# EAGLE board display_texto (EAGLE 5.02)
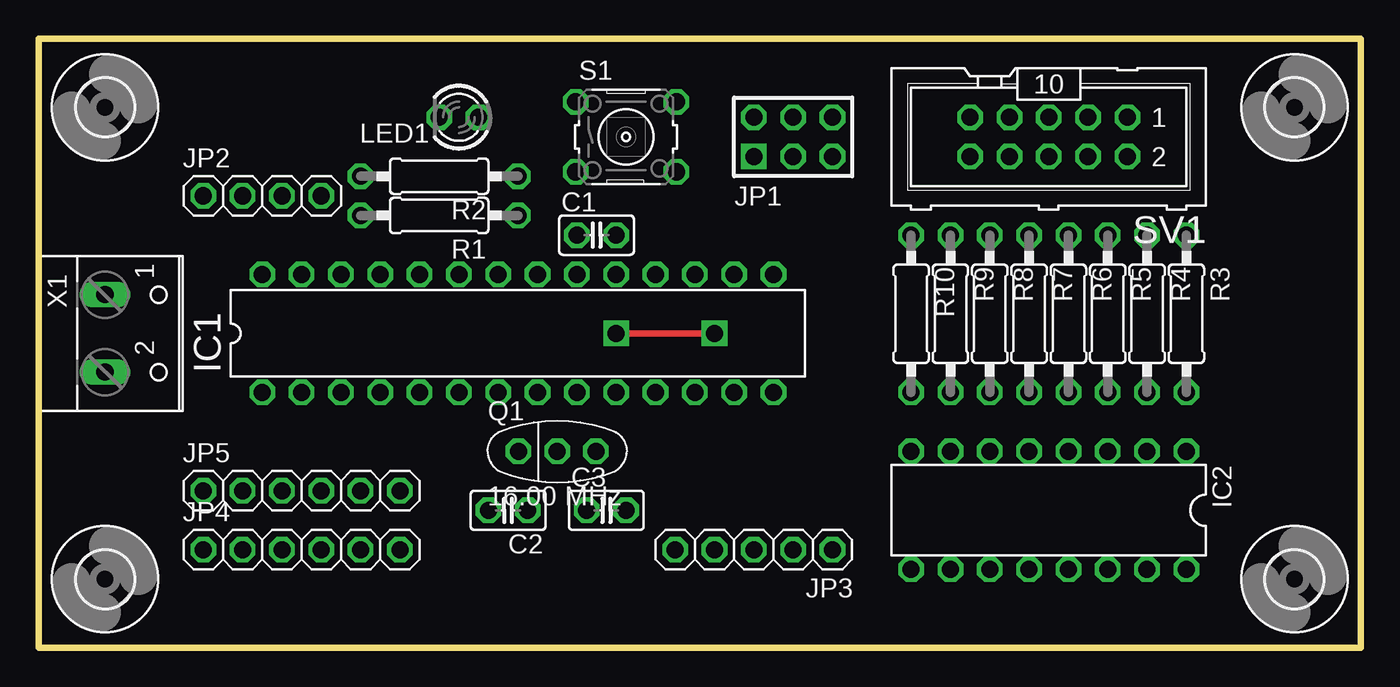
[diagram p0: board, top side]
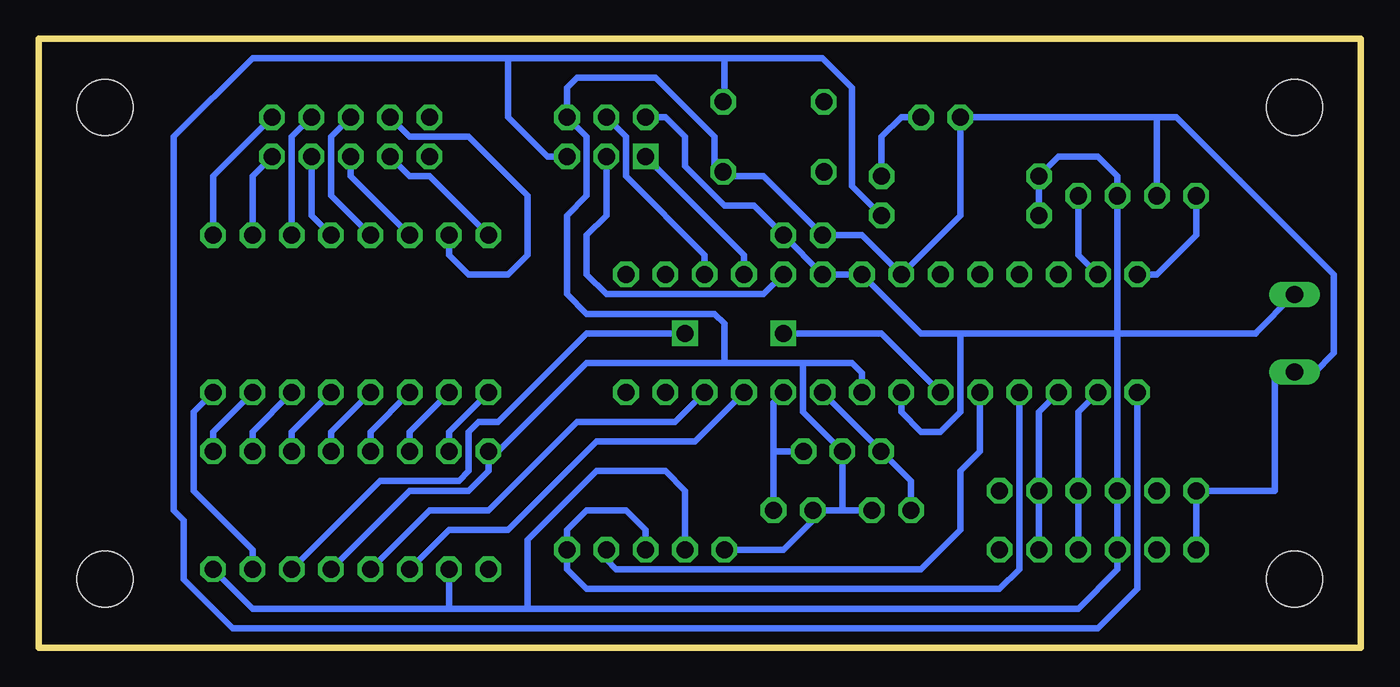
[diagram p1: board, bottom side, seen from below]

Size 85.4 x 39.36 mm. Coordinates in mm from the lower left corner, seen from the top.
Outline: 0,0 85.4,0 85.4,39.36 0,39.36 0,0
Copper layers (1*16): Top 0.035mm / dielectric 1.5mm / Bottom 0.035mm
Design rules "default": minimum track width 10mil, minimum drill 24mil, track to track 8mil, track to pad 8mil, pad to pad 8mil, via to via 8mil, smd to smd 8mil, copper to edge 40mil, drill to drill 8mil, minimum pad ring 10mil, minimum via ring 8mil, stop-mask expansion 4mil, vias tented up to drill 0mil, thermal gap 10mil

## Footprints (pad centres in the part's own frame; a part is rotated, then mirrored left to right if it is on the bottom)
C025-025X050 = drill 1.1 octagon: 1 -1.27,0; 2 1.27,0
DIL28-3 = drill 1.1 octagon: 1 -16.51,-3.81; 2 -13.97,-3.81; 3 -11.43,-3.81; 4 -8.89,-3.81; 5 -6.35,-3.81; 6 -3.81,-3.81; 7 -1.27,-3.81; 8 1.27,-3.81; 9 3.81,-3.81; 10 6.35,-3.81; 11 8.89,-3.81; 12 11.43,-3.81; 13 13.97,-3.81; 14 16.51,-3.81; 15 16.51,3.81; 16 13.97,3.81; 17 11.43,3.81; 18 8.89,3.81; 19 6.35,3.81; 20 3.81,3.81; 21 1.27,3.81; 22 -1.27,3.81; 23 -3.81,3.81; 24 -6.35,3.81; 25 -8.89,3.81; 26 -11.43,3.81; 27 -13.97,3.81; 28 -16.51,3.81
DIL16 = drill 1.1 octagon: 1 -8.89,-3.81; 2 -6.35,-3.81; 3 -3.81,-3.81; 4 -1.27,-3.81; 5 1.27,-3.81; 6 3.81,-3.81; 7 6.35,-3.81; 8 8.89,-3.81; 9 8.89,3.81; 10 6.35,3.81; 11 3.81,3.81; 12 1.27,3.81; 13 -1.27,3.81; 14 -3.81,3.81; 15 -6.35,3.81; 16 -8.89,3.81
AVR-ISP-6 = drill 1.1 square: 1 -2.54,-1.27 | drill 1.1 octagon: 2 -2.54,1.27; 3 0,-1.27; 4 0,1.27; 5 2.54,-1.27; 6 2.54,1.27
1X04 = drill 1.1 octagon: 1 -3.81,0; 2 -1.27,0; 3 1.27,0; 4 3.81,0
1X05 = drill 1.1 octagon: 1 -5.08,0; 2 -2.54,0; 3 0,0; 4 2.54,0; 5 5.08,0
1X06 = drill 1.1 octagon: 1 -6.35,0; 2 -3.81,0; 3 -1.27,0; 4 1.27,0; 5 3.81,0; 6 6.35,0
LED3MM = drill 1.1 octagon: A -1.27,0; K 1.27,0
CSTLS_G9 = drill 1.1 octagon: 1 -2.5,0; 2 0,0; 3 2.5,0
0207/10 = drill 1.1 octagon: 1 -5.08,0; 2 5.08,0
B3F-10XX = drill 1.1 octagon: 1 -3.251,2.261; 2 3.251,2.261; 3 -3.251,-2.261; 4 3.251,-2.261
ML10 = drill 1.1 octagon: 1 -5.08,-1.27; 2 -5.08,1.27; 3 -2.54,-1.27; 4 -2.54,1.27; 5 0,-1.27; 6 0,1.27; 7 2.54,-1.27; 8 2.54,1.27; 9 5.08,-1.27; 10 5.08,1.27
3,6 = hole 3.6: 0,0
W237-102 = drill 1.1 long: 1 -2.5,-1.27; 2 2.5,-1.27

## Placement (x,y rotation side)
C1  0.1uF  [C025-025X050]  36.03,26.67 0 top
C2  0.1uF  [C025-025X050]  30.32,8.88 180 top
C3  0.1uF  [C025-025X050]  36.66,8.88 0 top
IC1  MEGA8-P  [DIL28-3]  30.95,20.32 0 top
IC2  74HC595N  [DIL16]  65.24,8.88 180 top
JP1  AVR-ISP-6  [AVR-ISP-6]  48.73,33.02 0 top
JP2  [1X04]  14.44,29.21 0 top
JP3  [1X05]  46.19,6.34 180 top
JP4  [1X06]  16.98,6.34 0 top
JP5  [1X06]  16.98,10.15 0 top
LED1  [LED3MM]  27.14,34.28 180 top
Q1  16.00 MHz  [CSTLS_G9]  33.49,12.69 0 top
R1  10 K  [0207/10]  25.87,27.94 180 top
R2  1 K  [0207/10]  25.87,30.48 180 top
R3  1 K  [0207/10]  74.13,21.59 270 top
R4  1 K  [0207/10]  71.59,21.59 270 top
R5  1 K  [0207/10]  69.05,21.59 270 top
R6  1 K  [0207/10]  66.51,21.59 270 top
R7  1 K  [0207/10]  63.97,21.59 270 top
R8  1 K  [0207/10]  61.43,21.59 270 top
R9  1 K  [0207/10]  58.89,21.59 270 top
R10  1 K  [0207/10]  56.35,21.59 270 top
S1  [B3F-10XX]  37.93,33.02 0 top
SV1  [ML10]  65.24,33.02 180 top
U$1  [3,6]  4.28,34.92 0 top
U$2  [3,6]  4.28,4.44 0 top
U$3  [3,6]  81.12,34.92 0 top
U$4  [3,6]  81.12,4.44 0 top
X1  [W237-102]  5.55,20.32 270 top

## Library data of the parts
C1-C3 IC1 JP1 JP4 JP5 LED1 Q1 R1 S1 = ccard
IC2 JP2 JP3 R2-R10 SV1 U$1-U$4 X1 = display

## Nets
#RST: IC1.1 JP1.5 R1.1 S1.2
+5V: C1.2 IC1.7 IC1.20 IC1.21 IC2.10 IC2.16 JP1.2 JP2.3 JP3.4 JP4.3 JP5.3 R1.2 R2.2 X1.1
C_CLOCK: IC1.4 JP3.1 JP3.3
C_RESET: IC1.5 JP3.2
GND: C1.1 C2.1 C3.1 IC1.8 IC1.22 IC2.8 IC2.13 JP1.6 JP2.2 JP3.5 JP4.1 JP5.1 LED1.K Q1.2 S1.4 X1.2
L_CLOCK: IC1.11 IC2.11
L_DATA: IC1.6 IC2.14
L_LATCH: IC1.12 IC2.12
N$1: IC1.28 JP2.1
N$2: IC1.19 JP1.3
N$3: IC1.18 JP1.1
N$4: IC1.17 JP1.4
N$5: C3.2 IC1.10 Q1.3
N$6: C2.2 IC1.9 Q1.1
N$7: IC1.27 JP2.4
N$8: IC2.2 R5.2
N$9: R3.1 SV1.1
N$11: R4.1 SV1.2
N$12: R5.1 SV1.3
N$13: R6.1 SV1.4
N$14: R7.1 SV1.5
N$15: R8.1 SV1.6
N$16: LED1.A R2.1
N$17: R9.1 SV1.7
N$18: R10.1 SV1.8
N$19: IC2.4 R7.2
N$20: IC2.5 R8.2
N$21: IC2.6 R9.2
N$22: IC2.7 R10.2
N$23: IC2.3 R6.2
N$24: IC2.1 R4.2
N$25: IC2.15 R3.2
RXD: IC1.2 JP4.4 JP5.4
TXD: IC1.3 JP4.5 JP5.5

## Tracks (layer width: path | path; a pad name or v marks a point on that pad's centre or on a via)
#RST
  Bottom 0.406: R1.1 32.85,29.84 32.85,36.19 34.76,38.09 41.11,38.09 | S1.2 41.11,35.35 41.11,38.09 | IC1.1 14.44,3.81 16.98,1.27 72.86,1.27 76.04,4.44 76.04,8.25 76.67,8.88 76.67,33.02 71.59,38.09 55.08,38.09 | 55.08,38.09 41.11,38.09 | JP1.5 52.54,31.75 55.08,34.28 55.08,38.09
+5V
  Bottom 0.406: JP1.2 44.92,34.28 43.65,33.02 43.65,31.11 41.11,28.57 39.2,28.57 C1.2 IC1.20 IC1.21 28.41,20.32 25.87,20.32 | 15.71,20.32 6.82,20.32 | 6.82,20.32 6.78,20.32 | 15.71,20.32 JP2.3 15.71,30.48 16.98,31.75 19.52,31.75 R2.2 R1.2 | 15.71,20.32 25.87,20.32 | 15.71,20.32 JP5.3 JP4.3 15.71,5.08 18.25,2.54 53.81,2.54 | IC1.7 29.68,15.23 28.41,13.96 27.14,13.96 25.87,15.23 25.87,20.32 | X1.1 4.32,22.82 6.82,20.32 | 53.81,2.54 58.89,2.54 | 58.89,2.54 71.59,2.54 IC2.16 | 58.89,2.54 IC2.10 | 53.81,2.54 53.81,6.98 49.36,11.42 44.92,11.42 43.65,10.15 JP3.4
C_CLOCK
  Bottom 0.406: IC1.4 22.06,5.08 23.33,3.81 50,3.81 51.27,5.08 JP3.1 51.27,7.62 50,8.88 47.46,8.88 46.19,7.62 JP3.3
C_RESET
  Bottom 0.406: IC1.5 24.6,12.69 25.87,11.42 25.87,7.62 28.41,5.08 48.09,5.08 48.73,5.71 JP3.2
GND
  Bottom 0.406: C2.1 33.49,8.88 | 33.49,8.88 C3.1 35.39,8.25 37.3,6.34 JP3.5 | 33.49,8.88 Q1.2 36.03,15.23 36.03,18.41 | JP4.1 JP5.1 5.55,10.15 5.55,17.78 | 5.55,17.78 X1.2 | IC2.13 61.43,10.15 57.62,10.15 56.35,11.42 IC2.8 55.71,12.69 50,18.41 41.11,18.41 | 36.03,18.41 41.11,18.41 | 41.11,18.41 41.11,20.95 41.74,21.59 50,21.59 51.27,22.86 51.27,27.94 50,29.21 50,33.02 JP1.6 51.27,36.19 50.63,36.82 45.55,36.82 41.74,33.02 41.74,31.11 41.11,30.48 | 41.11,30.48 41.11,30.68 S1.4 41.19,30.55 41.11,30.48 | 5.55,17.78 3.01,17.78 1.74,19.05 1.74,24.12 11.9,34.28 13.17,34.28 | 13.17,34.28 LED1.K 25.87,27.94 IC1.22 32.22,26.67 C1.1 38.57,30.48 41.11,30.48 | 13.17,34.28 JP2.2 | IC1.8 32.22,17.78 32.85,18.41 36.03,18.41
L_CLOCK
  Bottom 0.406: IC2.11 58.89,7.62 55.08,7.62 49.36,13.33 43.02,13.33 IC1.11
L_DATA  (via drill 1.1)
  Top 0.406: v37.3,20.32 v43.65,20.32
  Bottom 0.406: IC1.6 30.95,20.32 v37.3,20.32 | IC2.14 63.34,10.79 58.26,10.79 57.62,11.42 57.62,13.96 56.98,14.6 55.71,14.6 50,20.32 v43.65,20.32
L_LATCH
  Bottom 0.406: IC2.12 60.16,8.88 56.35,8.88 50.63,14.6 44.28,14.6 IC1.12
N$1
  Bottom 0.406: JP2.1 10.63,26.67 13.17,24.12 IC1.28
N$2
  Bottom 0.406: IC1.19 38.57,22.86 48.73,22.86 50,24.12 50,26.67 48.73,27.94 JP1.3
N$3
  Bottom 0.406: IC1.18 39.84,25.39 JP1.1
N$4
  Bottom 0.406: JP1.4 47.46,33.02 47.46,30.48 42.38,25.39 IC1.17
N$5
  Bottom 0.406: IC1.10 37.93,15.87 37.93,12.69 | C3.2 37.93,12.69 | 37.93,12.69 Q1.3
N$6
  Bottom 0.406: 30.95,12.69 IC1.9 | 30.95,12.69 Q1.1 | C2.2 29.04,10.79 30.95,12.69
N$7
  Bottom 0.406: IC1.27 18.25,25.39 JP2.4
N$8
  Bottom 0.406: R5.2 71.59,13.96 IC2.2
N$9
  Bottom 0.406: SV1.1 74.13,30.48 R3.1
N$11
  Bottom 0.406: SV1.2 71.59,30.48 R4.1
N$12
  Bottom 0.406: SV1.3 69.05,33.02 R5.1
N$13
  Bottom 0.406: R6.1 67.78,27.94 SV1.4
N$14
  Bottom 0.406: R7.1 66.51,29.21 66.51,33.02 SV1.5
N$15
  Bottom 0.406: R8.1 65.24,30.48 SV1.6
N$16
  Bottom 0.406: LED1.A 29.68,34.28 30.95,33.02 R2.1
N$17
  Bottom 0.406: SV1.7 61.43,33.02 57.62,33.02 53.81,29.21 53.81,25.39 55.08,24.12 57.62,24.12 58.89,25.39 R9.1
N$18
  Bottom 0.406: R10.1 60.16,30.48 61.43,30.48 SV1.8
N$19
  Bottom 0.406: R7.2 66.51,13.96 IC2.4
N$20
  Bottom 0.406: R8.2 63.97,13.96 IC2.5
N$21
  Bottom 0.406: R9.2 61.43,13.96 IC2.6
N$22
  Bottom 0.406: IC2.7 58.89,13.96 R10.2
N$23
  Bottom 0.406: R6.2 69.05,13.96 IC2.3
N$24
  Bottom 0.406: R4.2 74.13,13.96 IC2.1
N$25
  Bottom 0.406: IC2.15 71.59,6.34 75.4,10.15 75.4,15.23 R3.2
RXD
  Bottom 0.406: JP4.4 JP5.4 18.25,15.23 IC1.2
TXD
  Bottom 0.406: JP4.5 JP5.5 20.79,15.23 IC1.3